# EAGLE board GP-IVL2-mod (EAGLE 6.3)
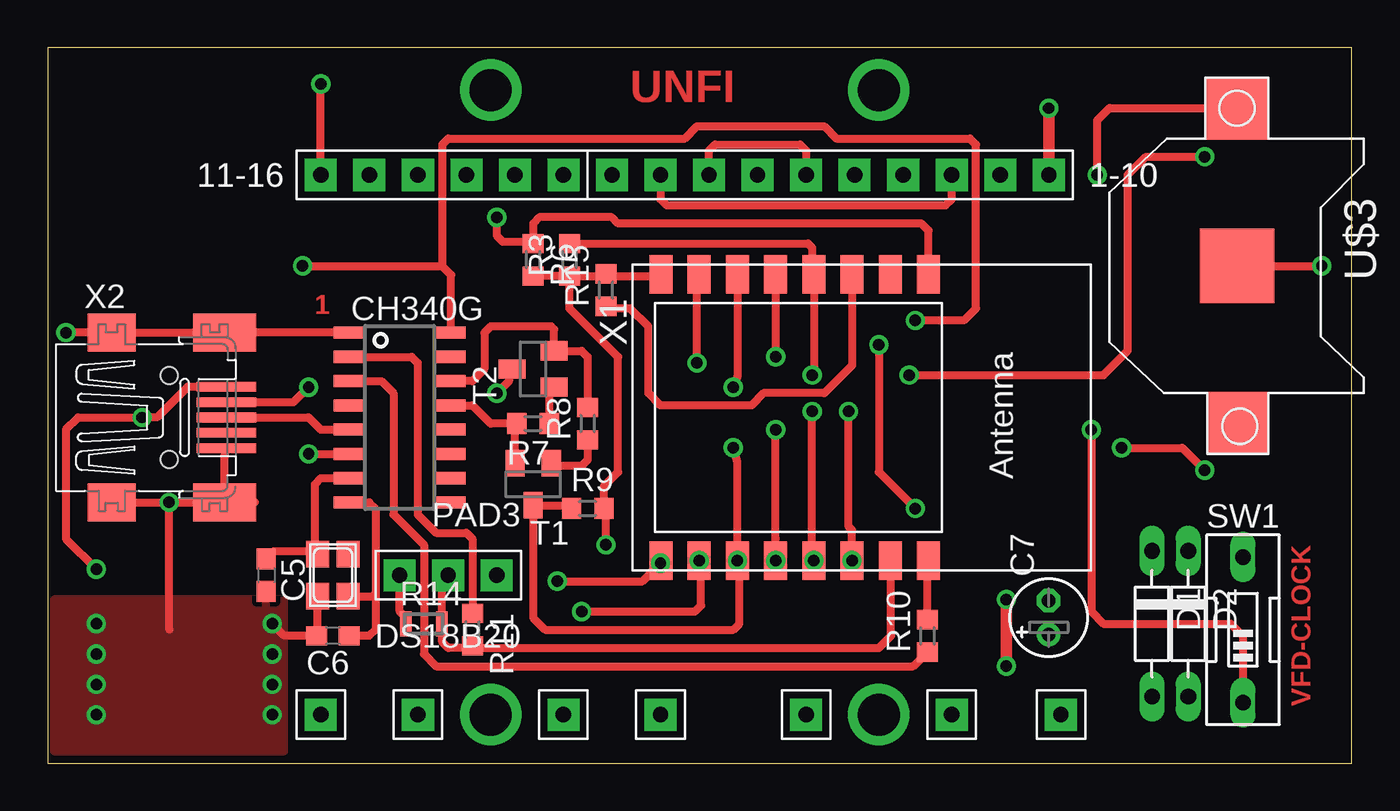
[diagram p0: board, top side]
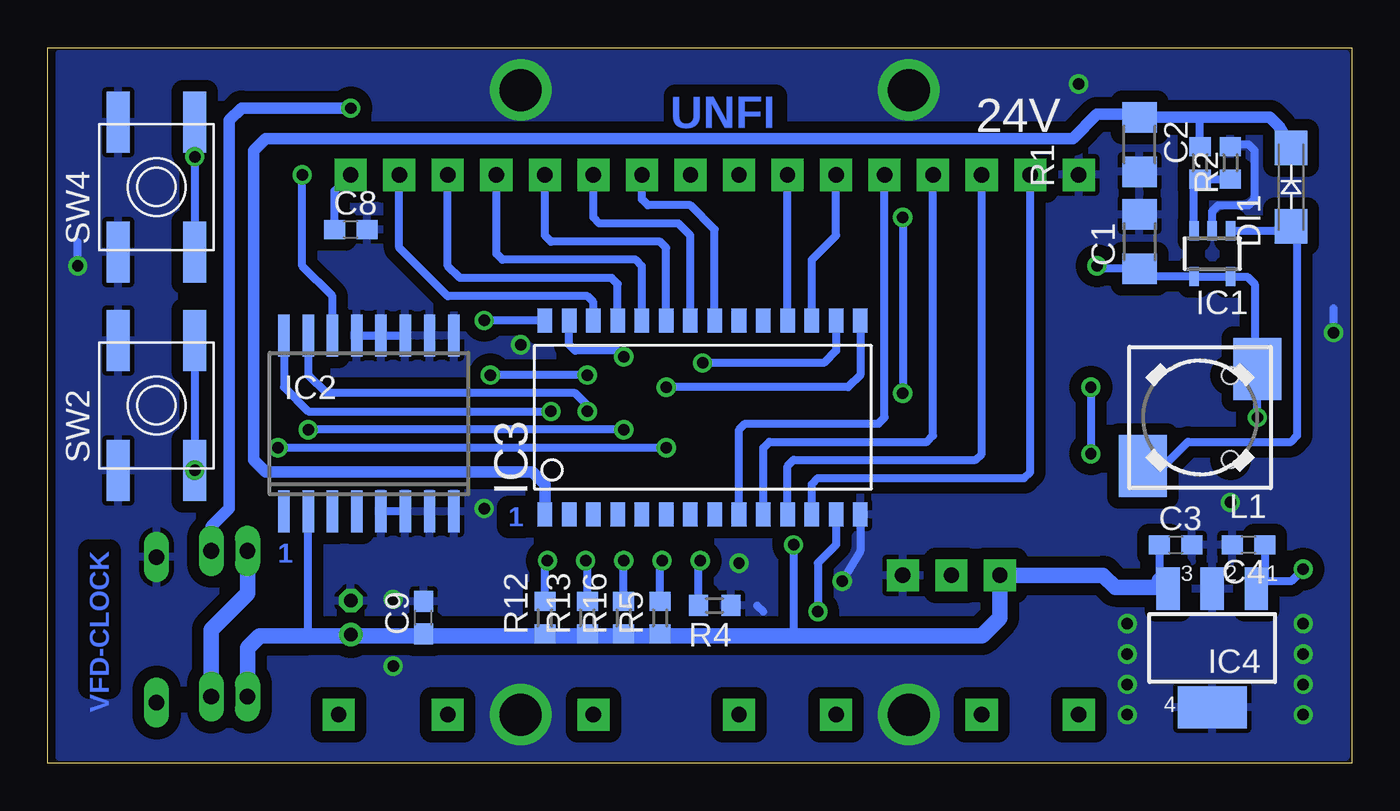
[diagram p1: board, bottom side, seen from below]

Size 68.24 x 37.45 mm. Coordinates in mm from the lower left corner, seen from the top.
Outline: 0,0 68.24,0 68.24,37.45 0,37.45 0,0
Copper layers (1*16): Top 0.035mm / dielectric 1.5mm / Bottom 0.035mm
Design rules "default *": minimum track width 10mil, minimum drill 24mil, track to track 8mil, track to pad 8mil, pad to pad 8mil, via to via 8mil, smd to smd 8mil, copper to edge 0mil, drill to drill 8mil, minimum pad ring 10mil, minimum via ring 8mil, stop-mask expansion 4mil, vias tented up to drill 0mil, thermal gap 10mil
Net classes: 1 Power: width 0.305 mm

## Footprints (pad centres in the part's own frame; a part is rotated, then mirrored left to right if it is on the bottom)
PAD1 = drill 0.8 pad 1.676 square: 1 0,0
PAD10 = drill 0.8 pad 1.676 square: P$1 0,0; P$2 2.54,0; P$3 5.08,0; P$4 7.62,0; P$5 10.16,0; P$6 12.7,0; P$7 15.24,0; P$8 17.78,0; P$9 20.32,0; P$10 22.86,0
PAD6 = drill 0.8 pad 1.676 square: P$1 0,0; P$2 2.54,0; P$3 5.08,0; P$4 7.62,0; P$5 10.16,0; P$6 12.7,0
1206 = smd 1.6 x 1.803: 1 -1.422,0; 2 1.422,0
C0603 = smd 1.1 x 1: 1 -0.85,0; 2 0.85,0
E1,8-4 = drill 0.711 pad 1.168: + -0.889,0 | drill 0.711 pad 1.168 octagon: - 0.889,0
D-7.5 = drill 0.813 long: A 3.81,0; C -3.81,0
DI-214 = smd 1.8 x 1.7: A -2.05,0; K 2.05,0
PAD3 = drill 0.8 pad 1.676 square: P$1 0,0; P$2 2.54,0; P$3 5.08,0
SOT23-5 = smd 0.5 x 1: 1 -0.95,-1.2; 2 0,-1.2; 3 0.95,-1.2; 4 0.95,1.2; 5 -0.95,1.2
SO16W = smd 0.6 x 2.2: 1 -4.445,-4.6; 2 -3.175,-4.6; 3 -1.905,-4.6; 4 -0.635,-4.6; 5 0.635,-4.6; 6 1.905,-4.6; 7 3.175,-4.6; 8 4.445,-4.6; 9 4.445,4.6; 10 3.175,4.6; 11 1.905,4.6; 12 0.635,4.6; 13 -0.635,4.6; 14 -1.905,4.6; 15 -3.175,4.6; 16 -4.445,4.6
SO-28W = smd 0.762 x 1.27: 1 -8.255,-5.08; 2 -6.985,-5.08; 3 -5.715,-5.08; 4 -4.445,-5.08; 5 -3.175,-5.08; 6 -1.905,-5.08; 7 -0.635,-5.08; 8 0.635,-5.08; 9 1.905,-5.08; 10 3.175,-5.08; 11 4.445,-5.08; 12 5.715,-5.08; 13 6.985,-5.08; 14 8.255,-5.08; 15 8.255,5.08; 16 6.985,5.08; 17 5.715,5.08; 18 4.445,5.08; 19 3.175,5.08; 20 1.905,5.08; 21 0.635,5.08; 22 -0.635,5.08; 23 -1.905,5.08; 24 -3.175,5.08; 25 -4.445,5.08; 26 -5.715,5.08; 27 -6.985,5.08; 28 -8.255,5.08
SOT223 = smd 1.219 x 2.235: 1 -2.311,-3.099; 2 0,-3.099; 3 2.311,-3.099 | smd 3.6 x 2.2: 4 0,3.099
DR73A = smd 2.5 x 3.25: 1 -3,-2.54; 2 3,2.54
NX3225 = smd 1.4 x 1.2: 1 -1.1,-0.8; 2 1.1,-0.8; 3 1.1,0.8; 4 -1.1,0.8
0603 = smd 1 x 1.1: 1 -0.85,0; 2 0.85,0
R0603 = smd 1 x 1.1: 1 -0.85,0; 2 0.85,0
MINI_MELF-0102W = smd 0.6 x 1.3: 1 -0.95,0; 2 0.95,0
EDG-01 = drill 0.813 long: 1 0,-3.81; 2 0,3.81
EVQ-Q2 = smd 3.2 x 1.2: A -3.4,-2; A' 3.4,-2; B -3.4,2; B' 3.4,2
SOT23 = smd 1 x 1.4: 1 -0.95,-1.1; 2 0.95,-1.1; 3 0,1.1
SOIC16 = smd 0.635 x 1.524: 1 -4.445,-2.695; 2 -3.175,-2.695; 3 -1.905,-2.695; 4 -0.635,-2.695; 5 0.635,-2.695; 6 1.905,-2.695; 7 3.175,-2.695; 8 4.445,-2.695; 9 4.445,2.695; 10 3.175,2.695; 11 1.905,2.695; 12 0.635,2.695; 13 -0.635,2.695; 14 -1.905,2.695; 15 -3.175,2.695; 16 -4.445,2.695
CR1220-SMD = smd 3.2 x 3.2: +$1 -8.2,0; +$2 8.2,0 | smd 3.9 x 3.9: - 0,0
ESP-12 = smd 2 x 1.2: 1 -7.5,4.5; 2 -7.5,2.5; 3 -7.5,0.5; 4 -7.5,-1.5; 5 -7.5,-3.5; 6 -7.5,-5.5; 7 -7.5,-7.5; 8 -7.5,-9.5; 9 7.5,-9.5; 10 7.5,-7.5; 11 7.5,-5.5; 12 7.5,-3.5; 13 7.5,-1.5; 14 7.5,0.5; 15 7.5,2.5; 16 7.5,4.5
32005-201 = smd 3.1 x 0.5: 1 3,1.6; 2 3,0.8; 3 3,0; 4 3,-0.8; 5 3,-1.6 | smd 2.5 x 2: M1 -3,-4.45; M2 -3,4.45 | smd 3.3 x 2: M3 2.9,4.45; M4 2.9,-4.45 | hole 0.9: 0,2.2; 0,-2.2

## Placement (x,y rotation side)
1  1  [PAD1]  53.02,2.54 0 top
1-10  1-10  [PAD10]  52.39,30.8 180 top
2  2  [PAD1]  47.31,2.54 0 top
3  3  [PAD1]  39.69,2.54 0 top
4  4  [PAD1]  32.07,2.54 0 top
5  5  [PAD1]  26.99,2.54 0 top
6  6  [PAD1]  19.37,2.54 0 top
7  7  [PAD1]  14.29,2.54 0 top
11-16  11-16  [PAD6]  26.99,30.8 180 top
C1  10u/10V  [1206]  11.11,27.3 90 bottom
C2  10u/50V  [1206]  11.11,32.38 270 bottom
C3  100n  [C0603]  9.21,11.43 0 bottom
C4  100n  [C0603]  5.4,11.43 180 bottom
C5  22  [C0603]  11.43,9.84 270 top
C6  22  [C0603]  14.92,6.67 180 top
C7  10u  [E1,8-4]  52.39,7.62 90 top
C8  100n  [C0603]  52.39,27.94 0 bottom
C9  100n  [C0603]  48.58,7.62 90 bottom
D1  [D-7.5]  57.79,7.3 270 top
D2  [D-7.5]  59.69,7.3 270 top
DI1  S34  [DI-214]  3.17,30.16 90 bottom
DS18B20  PAD3  [PAD3]  23.49,9.84 180 top
IC1  [SOT23-5]  7.3,26.67 180 bottom
IC2  DS3231/SO  [SO16W]  51.44,17.78 0 bottom
IC3  MAX6921  [SO-28W]  33.97,18.1 0 bottom
IC4  UA78M3v3  [SOT223]  7.3,6.03 180 bottom
L1  10uH  [DR73A]  7.94,18.1 180 bottom
Q1  [NX3225]  14.92,9.84 270 top
R1  100k  [0603]  7.94,31.43 90 bottom
R2  5,6k  [0603]  6.35,31.43 270 bottom
R3  10k  [R0603]  27.3,26.35 90 top
R4  10k  [R0603]  33.34,8.26 180 bottom
R5  10k  [R0603]  36.2,7.62 90 bottom
R6  10k  [R0603]  25.4,26.35 270 top
R7  12k  [R0603]  25.4,17.78 180 top
R8  12k  [R0603]  28.26,17.78 90 top
R9  10k  [R0603]  28.26,13.34 0 top
R10  470  [R0603]  46.04,6.67 90 top
R11  470  [R0603]  22.23,6.98 270 top
R12  3k3  [R0603]  42.23,7.62 90 bottom
R13  3k3  [R0603]  40.01,7.62 90 bottom
R14  3k3  [MINI_MELF-0102W]  19.69,7.3 0 top
R15  10k  [R0603]  29.21,24.76 90 top
R16  10k  [R0603]  38.1,7.62 90 bottom
SW1  [EDG-01]  62.55,6.98 0 top
SW2  SPST_TACT-EVQQ2  [EVQ-Q2]  62.55,18.73 90 bottom
SW4  SPST_TACT-EVQQ2  [EVQ-Q2]  62.55,30.16 90 bottom
T1  BC848  [SOT23]  25.4,14.61 180 top
T2  BC848  [SOT23]  25.4,20.64 90 top
U$1  CH340G  [SOIC16]  18.41,18.1 270 top
U$3  [CR1220-SMD]  62.23,26.04 270 top
X1  [ESP-12]  41.59,18.1 270 top
X2  MINI-USB  [32005-201]  6.35,18.1 0 top

## Library data of the parts
1 1-10 2-7 11-16 DS18B20 = tuskesor
C1 C2 DI1 IC1 L1 R1 R2 =  Zozo
C3-C9 R3-R16 = resistor
D1 D2 = diode
IC2 Q1 SW2 SW4 X1 = adafruit
IC3 = JVN
IC4 = linear
SW1 = special
T1 T2 = transistor
U$1 = ch340g
U$3 = adafruit1
X2 = con-cypressindustries; OC_FARNELL: unknown; OC_NEWARK: unknown

## Nets
+5V: C1.1 C4.1 IC1.4 IC1.5 IC3.28 IC4.1 L1.1 U$1.16 X2.1
BLANK: IC3.13 R4.2 X1.10
CLK: IC3.15 X1.6
D+: U$1.5 X2.3
D-: U$1.6 X2.2
DIN: IC3.27 X1.5
G1: Q1.4
GND: 11-16.P$6 C1.2 C2.2 C3.2 C4.2 C5.2 C6.2 C7.- C8.2 C9.2 DS18B20.P$1 IC1.2 IC2.5 IC2.6 IC2.7 IC2.8 IC2.9 IC2.10 IC2.11 IC2.12 IC2.13 IC3.14 IC4.2 IC4.4 Q1.2 R2.1 R4.1 SW1.2 SW2.B SW2.B' SW4.B SW4.B' U$1.1 U$3.- X1.9 X2.5 X2.M1 X2.M2 X2.M3 X2.M4
GPIO0: R9.1 T1.3
LOAD: IC3.16 X1.7
N$1: IC1.3 R1.1 R2.2
N$2: DI1.A IC1.1 L1.2
N$3: C5.1 Q1.1 U$1.7
N$4: R15.1 X1.3
N$5: IC2.14 U$3.+$1
N$8: R10.1 U$1.3
N$9: R7.1 T2.1
N$10: R8.1 T1.1
N$11: R8.2 T2.2 U$1.14
N$12: R7.2 T1.2 U$1.13
N$13: R11.1 U$1.2
N$14: C6.1 Q1.3 U$1.8
N$15: D1.C D2.A
N$16: 1-10.P$1 C8.1 D2.C
N$19: 1-10.P$2 IC3.26
N$20: 1-10.P$3 1-10.P$9 IC3.25
N$23: 1-10.P$4 IC3.24
N$24: 1-10.P$5 IC3.23
N$30: C3.1 C7.+ C9.1 D1.A DS18B20.P$3 IC2.2 IC4.3 R3.1 R5.1 R6.2 R9.2 R12.1 R13.1 R14.1 R15.2 R16.1 X1.8
N$31: 1-10.P$6 1-10.P$8 IC3.22
N$32: 1-10.P$7 IC3.21
N$35: 1-10.P$10 IC3.18
N$36: 11-16.P$1 IC3.17
N$37: 11-16.P$5 IC3.12
N$38: 11-16.P$4 IC3.11
N$39: 11-16.P$3 IC3.10
N$40: 11-16.P$2 IC3.9
RST: R6.1 T2.3 X1.1
RX: DS18B20.P$2 R11.2 R14.2 X1.15
S1: R3.2 SW4.A SW4.A' X1.4
S2: R5.2 SW2.A SW2.A' X1.11
SCL: IC2.16 R12.2 X1.14
SDA: IC2.15 R13.2 X1.13
SW1: R16.2 SW1.1 X1.12
TX: R10.2 X1.16
VBB: C2.1 DI1.K IC3.1 R1.2

## Tracks (layer width: path | path; a pad name or v marks a point on that pad's centre or on a via)
+5V  (via drill 0.6)
  Top 0.406: X2.1 7.31,19.7 5.71,18.1 v4.94,18.1 1.59,18.1 0.95,17.46 0.95,11.75 v2.54,10.16 | 20.96,22.7 U$1.16 21.11,25.56 20.64,26.04 | v45.4,23.18 47.94,23.18 48.58,23.81 48.58,32.38 48.26,32.7 41.27,32.7 40.64,33.34 33.97,33.34 33.34,32.7 20.96,32.7 20.64,32.38 20.64,26.04 | v13.33,26.04 20.64,26.04
  Bottom 0.406: IC3.28 v45.4,23.18 | 5.08,21.91 5.08,25.08 5.47,25.47 IC1.5 IC1.4 10.7,25.47 C1.1 13.18,25.88 v13.33,26.04 | 5.08,21.91 5.08,20.78 L1.1 v4.94,18.1 | 4.94,21.76 5.08,21.91 | 4.91,9.21 IC4.1 4.55,9.57 | C4.1 4.55,9.57 | v2.54,10.16 3.18,9.53 4.5,9.53 4.55,9.57
BLANK  (via drill 0.6)
  Top 0.406: 33.97,10.48 34.09,10.99 X1.10 34.19,10.5 R4.2 33.87,7.94 v27.94,7.94
  Bottom 0.406: IC3.13 26.99,11.43 27.94,10.48 v27.94,7.94 | R4.2 34.19,10.5 X1.10
  other vias: 34.09,10.6
CLK  (via drill 0.6)
  Top 0.406: X1.6 36.09,20.22 v35.88,19.69
  Bottom 0.406: IC3.15 25.72,20.32 26.35,19.69 v35.88,19.69
D+
  Top 0.406: X2.3 13.65,18.1 14.29,17.46 U$1.5
D-  (via drill 0.6)
  Top 0.406: X2.2 12.87,18.9 v13.65,19.69 | v13.65,16.19 U$1.6
  Bottom 0.406: v13.65,19.69 v13.65,16.19
DIN  (via drill 0.6)
  Top 0.406: X1.5 38.09,21.28 v38.1,21.27
  Bottom 0.406: v38.1,21.27 38.42,21.59 40.64,21.59 40.96,21.91 IC3.27
GND  (via drill 0.6, 2.2)
  Top 0.406: X2.M1 v6.34,13.65 v6.35,13.65 | X2.5 9.25,16.08 X2.M4 10.83,13.65 v6.35,13.65 | 11-16.P$6 v14.29,35.56 | Q1.2 14.12,6.72 C6.2 12.38,6.67 v11.75,7.3 | 11.68,8.74 C5.2 | 6.36,6.99 6.35,8.26 v6.35,13.65 | v26.67,9.53 31.12,9.53 v32.07,10.48 32.07,10.57 X1.9 | U$3.- v66.68,26.04 | v43.5,21.91 43.5,15.24 v45.4,13.34 | U$1.1 9.84,22.54 | 9.84,22.54 X2.M3 | X2.M3 7.62,22.55 X2.M2 v0.96,22.55 v0.95,22.54 | X2.M3 9.84,22.55 9.84,22.54
  Top 0.61: v50.16,5.08 v50.16,8.57
  Bottom 0.406: IC2.6 IC2.5 | IC2.13 IC2.12 IC2.11 | IC1.2 7.3,28.89 6.99,29.21 5.4,29.21 5.08,29.53 5.08,32.07 5.4,32.38 6.25,32.38 R2.1 | IC3.14 25.72,11.11 v26.67,9.53 | 31.12,8.26 30.8,7.94 | v66.68,26.04 66.68,27.31 | v0.95,22.54 0.95,23.81
  other vias: 2.54,7.3 2.54,5.71 2.54,4.13 2.54,2.54 11.75,5.71 11.75,4.13 11.75,2.54 23.18,2.54 23.18,35.24 43.5,2.54 43.5,35.24
  pour Bottom (isolate 0.61): 0.32,0.32 67.63,0.32 67.63,37.15 0.32,37.15
  pour Top: 0.32,0.63 12.38,0.63 12.38,8.57 0.32,8.57
GPIO0
  Top 0.406: R9.1 27.24,13.51 T1.3 25.4,7.62 26.03,6.98 35.88,6.98 36.19,7.3 36.19,10.5
LOAD  (via drill 0.6)
  Top 0.406: v33.97,20.95 33.97,24.84 X1.7
  Bottom 0.406: v33.97,20.95 27.62,20.95 26.99,21.59 IC3.16
N$1
  Bottom 0.406: R2.2 R1.1 8.25,30.27 IC1.3
N$2
  Bottom 0.406: L1.2 9.84,15.56 8.57,16.83 3.18,16.83 2.86,17.14 2.86,27.31 DI1.A 3.42,27.87 IC1.1
N$3
  Top 0.406: U$1.7 14.29,14.92 13.97,14.61 13.97,11.1 | 13.97,11.1 Q1.1 | 13.97,11.1 11.83,11.1 C5.1
N$4
  Top 0.406: X1.3 42.09,20.82 40.64,19.37 37.47,19.37 36.83,18.73 32.07,18.73 31.43,19.37 31.43,22.86 30.48,23.81 29.31,23.81 R15.1
N$5  (via drill 0.6)
  Top 0.406: v54.93,30.8 54.93,33.66 55.56,34.29 62.18,34.29 U$3.+$1
  Bottom 0.406: IC2.14 53.34,24.45 54.93,26.04 v54.93,30.8
N$8
  Top 0.406: U$1.3 17.46,20 18.1,19.37 18.1,13.02 19.69,11.43 19.69,5.72 20.32,5.08 45.3,5.08 R10.1
N$9
  Top 0.406: R7.1 26.25,19.44 T2.1
N$10
  Top 0.406: R8.1 28.26,15.87 27.94,15.56 26.5,15.56 T1.1
N$11
  Top 0.406: U$1.14 22.22,20 22.86,20.64 22.86,22.54 23.18,22.86 26.35,22.86 26.5,22.71 T2.2 27.94,21.59 28.26,21.27 R8.2
N$12
  Top 0.406: U$1.13 22.22,18.73 23.18,17.78 R7.2 24.45,17.68 T1.2
N$13
  Top 0.406: U$1.2 19.05,21.27 19.37,20.95 19.37,13.02 20.32,12.06 21.91,12.06 22.22,11.75 R11.1
N$14
  Top 0.406: U$1.8 16.83,13.65 17.14,13.34 17.14,8.89 | 17.14,8.89 17.14,6.98 16.83,6.67 C6.1 | Q1.3 17,8.74 17.14,8.89
N$15
  Bottom 0.813: D1.C 57.79,8.89 59.69,6.98 D2.A
N$16  (via drill 0.6)
  Top 0.61: v52.39,34.29 1-10.P$1
  Bottom 0.406: C8.1 53.24,29.95 1-10.P$1
  Bottom 0.61: D2.C 59.69,12.38 58.74,13.34 58.74,33.66 58.1,34.29 v52.39,34.29
N$19
  Bottom 0.406: IC3.26 39.69,24.13 40.01,24.45 47.31,24.45 49.85,26.99 1-10.P$2
N$20
  Top 0.406: 1-10.P$9 32.07,29.53 32.38,29.21 46.99,29.21 47.31,29.53 1-10.P$3
  Bottom 0.406: IC3.25 38.42,25.08 38.73,25.4 46.67,25.4 47.31,26.04 1-10.P$3
N$23
  Bottom 0.406: IC3.24 37.15,26.04 37.47,26.35 44.45,26.35 44.77,26.67 1-10.P$4
N$24
  Bottom 0.406: IC3.23 35.88,26.99 36.19,27.31 41.91,27.31 42.23,27.62 1-10.P$5
N$30  (via drill 0.6)
  Top 0.406: v29.21,11.43 29.21,13.23 R9.2 29.11,14.5 29.85,15.24 29.85,21.27 27.31,23.81 R3.1 | 31.9,25.4 X1.8 | 32.07,25.57 X1.8 | R3.1 29.21,25.5 | 29.21,25.5 32,25.5 X1.8 | R3.1 R6.2 | R14.1 18.83,7.52 18.41,7.94 DS18B20.P$3 | R15.2 29.21,25.5
  Bottom 0.406: v29.21,11.43 29.21,6.67 33.87,6.67 | IC2.2 54.61,6.67 52.45,6.67 C7.+ 48.62,6.73 C9.1 | C3.1 10.06,9.57 | R5.1 36.19,6.67 | R13.1 42.23,6.67 | R12.1 40.32,6.67 | R16.1 38.1,6.67
  Bottom 0.813: D1.A 57.79,6.03 57.15,6.67 54.61,6.67 42.23,6.67 40.32,6.67 38.1,6.67 36.19,6.67 29.21,6.67 19.37,6.67 18.41,7.62 DS18B20.P$3 13.02,9.84 12.38,9.21 9.69,9.21 | 9.69,9.21 IC4.3 | 9.69,9.21 10.06,9.57
N$31
  Top 0.406: 1-10.P$8 34.61,32.07 34.93,32.38 39.37,32.38 39.69,32.07 1-10.P$6
  Bottom 0.406: IC3.22 34.61,27.62 35.24,28.26 39.37,28.26 39.69,28.58 1-10.P$6
N$32
  Bottom 0.406: IC3.21 33.34,27.94 34.61,29.21 36.83,29.21 37.15,29.53 1-10.P$7
N$35
  Bottom 0.406: IC3.18 1-10.P$10
N$36
  Bottom 0.406: IC3.17 28.26,26.35 26.99,27.62 11-16.P$1
N$37
  Bottom 0.406: IC3.12 28.26,14.61 27.94,14.92 17.14,14.92 16.83,15.24 11-16.P$5
N$38
  Bottom 0.406: IC3.11 29.53,15.56 29.21,15.87 19.69,15.87 19.37,16.19 11-16.P$4
N$39
  Bottom 0.406: IC3.10 30.8,16.51 30.48,16.83 22.22,16.83 21.91,17.14 11-16.P$3
N$40
  Bottom 0.406: IC3.9 32.07,17.46 31.75,17.78 24.76,17.78 24.45,18.1 11-16.P$2
RST  (via drill 0.6)
  Top 0.406: X1.1 46.09,27.88 45.72,28.26 29.85,28.26 29.53,28.58 25.72,28.58 25.4,28.26 R6.1 25.3,27.31 23.81,27.31 23.49,27.62 v23.49,28.58 | T2.3 24.13,20.64 24.13,20 v23.49,19.37
  Bottom 0.406: v23.49,28.58 v23.49,19.37
RX
  Top 0.406: 22.33,6.03 43.5,6.03 44.13,6.67 44.13,10.56 X1.15 | R14.2 20.53,7.09 | 22.33,6.03 R11.2 | 22.33,6.03 20.96,6.03 20.64,6.35 20.64,7.2 R14.2 | R14.2 20.63,9.52 DS18B20.P$2
S1  (via drill 0.6)
  Top 0.406: v40.01,20.32 40.09,20.41 X1.4 40.01,25.69 40.01,26.99 39.79,27.2 R3.2 | v45.08,20.32 55.25,20.32 56.51,21.59 56.51,30.8 57.47,31.75 v60.55,31.75
  Bottom 0.406: v40.01,20.32 v45.08,20.32 | SW4.A' v60.55,31.75 SW4.A
S2  (via drill 0.6)
  Top 0.406: X1.11 36.09,15.77 v35.88,16.51 | v56.2,16.51 59.37,16.51 SW2.A
  Bottom 0.406: v35.88,16.51 v56.2,16.51 | R5.2 36.19,10.5 X1.11 | SW2.A' SW2.A
  other vias: 36.09,10.6 60.55,15.33
SCL  (via drill 0.6)
  Top 0.406: X1.14 42.09,12.2 41.91,12.38 v41.91,18.42
  Bottom 0.406: IC2.16 55.88,19.69 54.61,18.42 v41.91,18.42 | R12.2 42.23,10.46 X1.14
  other vias: 42.09,10.6
SDA  (via drill 0.6)
  Top 0.406: X1.13 40.09,11.03 40.01,11.11 v40.01,18.42
  Bottom 0.406: IC2.15 54.61,20.32 53.66,19.37 40.64,19.37 40.01,18.73 v40.01,18.42 | R13.2 40.01,10.51 X1.13
  other vias: 40.09,10.6
SW1  (via drill 0.6)
  Top 0.406: v38.1,17.46 38.09,17.14 38.09,11.75 X1.12 | v54.61,17.46 54.61,7.94 55.25,7.3 61.91,7.3 62.55,6.67 SW1.1
  Bottom 0.406: v38.1,17.46 v54.61,17.46 | R16.2 38.1,10.59 X1.12
  other vias: 38.09,10.6
TX
  Top 0.406: R10.2 46.04,10.54 X1.16
VBB
  Bottom 0.406: R1.2 7.94,33.81
  Bottom 0.61: IC3.1 42.23,14.61 42.86,15.24 56.83,15.24 57.47,15.87 57.47,32.07 56.83,32.7 14.61,32.7 13.33,33.97 11.28,33.97 C2.1 7.94,33.81 4.28,33.81 3.81,33.34 DI1.K

## Text on the board
Top: UNFI | 1 | VFD-CLOCK
Bottom: UNFI | 1 | VFD-CLOCK | 1
bPlace: 24V